# EAGLE board Adafruit_TIMESQUARE (EAGLE 6.3)
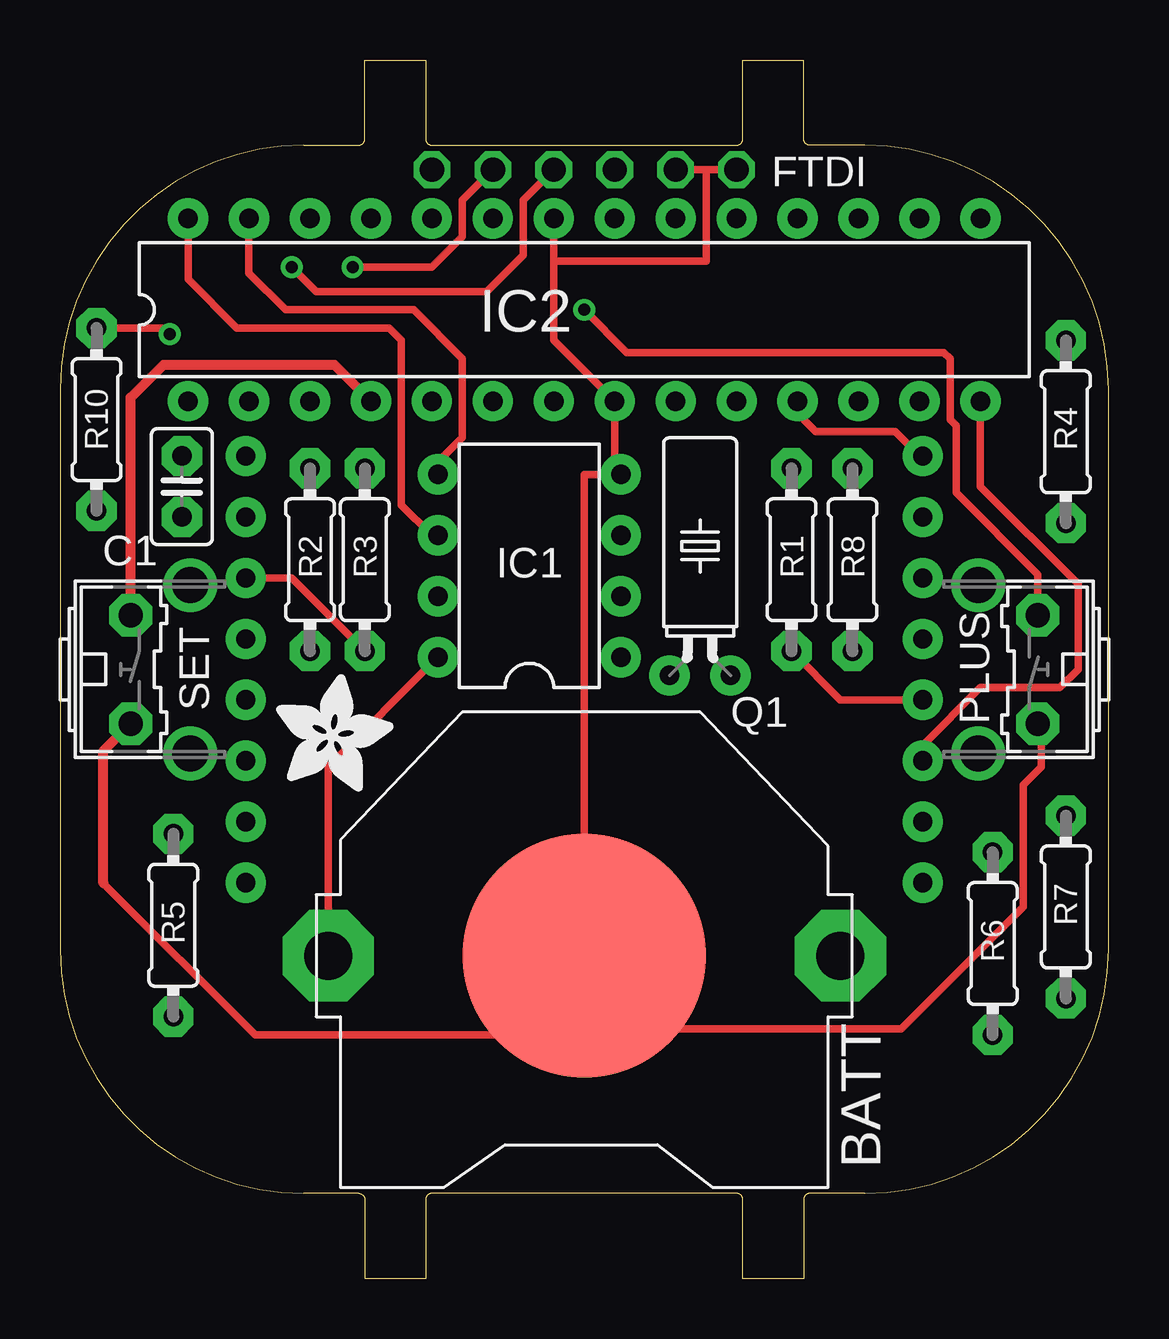
[diagram p0: board, top side]
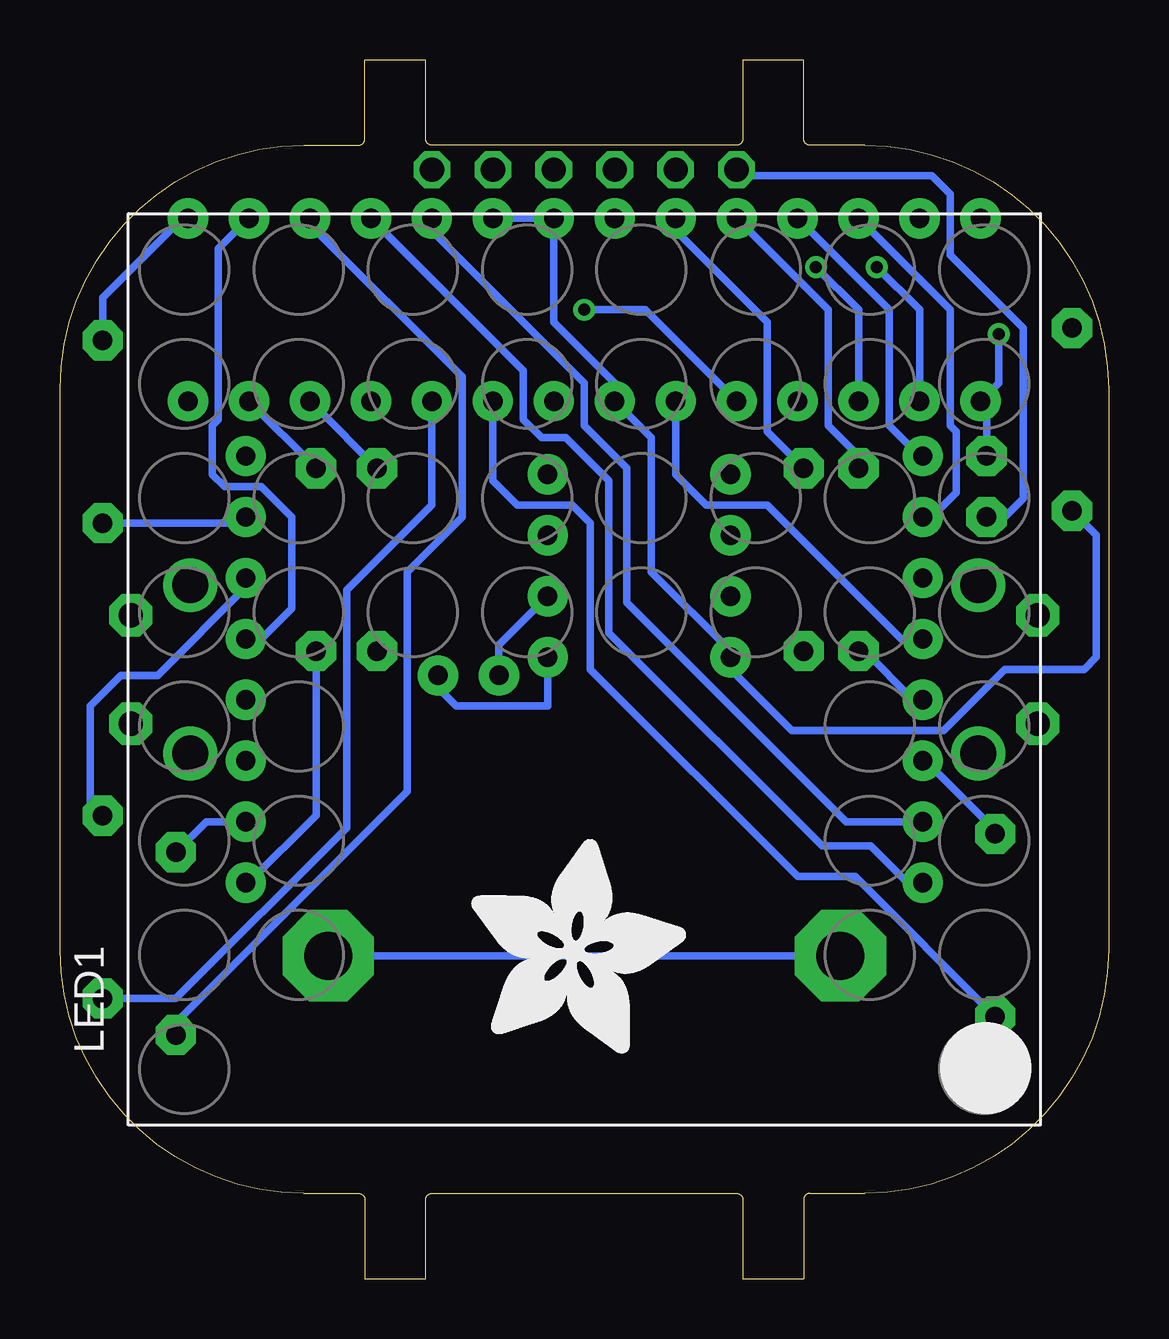
[diagram p1: board, bottom side, seen from below]

Size 43.69 x 50.8 mm. Coordinates in mm from the lower left corner, seen from the top.
Outline: 43.69,37.08 arc90 33.53,47.24 31.24,47.24 arc-90 30.99,47.5 30.99,50.8 28.45,50.8 28.45,47.5 arc-90 28.19,47.24 15.49,47.24 arc-90 15.24,47.5 15.24,50.8 12.7,50.8 12.7,47.5 arc-90 12.45,47.24 10.16,47.24 arc90 0,37.08 0,13.72 arc90 10.16,3.56 12.45,3.56 arc-90 12.7,3.3 12.7,0 15.24,0 15.24,3.3 arc-90 15.49,3.56 28.19,3.56 arc-90 28.45,3.3 28.45,0 30.99,0 30.99,3.3 arc-90 31.24,3.56 33.53,3.56 arc90 43.69,13.72 43.69,37.08
Copper layers (1*16): Top 0.035mm / dielectric 1.5mm / Bottom 0.035mm
Design rules "default *": minimum track width 12mil, minimum drill 19mil, track to track 10mil, track to pad 10mil, pad to pad 10mil, via to via 10mil, smd to smd 10mil, copper to edge 10mil, drill to drill 8mil, minimum pad ring 10mil, minimum via ring 8mil, stop-mask expansion 4mil, vias tented up to drill 0mil, thermal gap 10mil

## Footprints (pad centres in the part's own frame; a part is rotated, then mirrored left to right if it is on the bottom)
CR2032-THRU = drill 2 pad 3.81 octagon: +1 -10.668,0; +2 10.668,0 | smd 10.16 x 10.16: - 0,0
C025-025X050 = drill 0.813 pad 1.676 octagon: 1 -1.27,0; 2 1.27,0
1X06-CLEAN = drill 1.016 octagon: 1 -6.35,0; 2 -3.81,0; 3 -1.27,0; 4 1.27,0; 5 3.81,0; 6 6.35,0
DIL08-ROUND = drill 0.813 pad 1.676: 1 -3.81,-3.81; 2 -1.27,-3.81; 3 1.27,-3.81; 4 3.81,-3.81; 5 3.81,3.81; 6 1.27,3.81; 7 -1.27,3.81; 8 -3.81,3.81
DIL28-3-ROUND = drill 0.813 pad 1.676: 1 -16.51,-3.81; 2 -13.97,-3.81; 3 -11.43,-3.81; 4 -8.89,-3.81; 5 -6.35,-3.81; 6 -3.81,-3.81; 7 -1.27,-3.81; 8 1.27,-3.81; 9 3.81,-3.81; 10 6.35,-3.81; 11 8.89,-3.81; 12 11.43,-3.81; 13 13.97,-3.81; 14 16.51,-3.81; 15 16.51,3.81; 16 13.97,3.81; 17 11.43,3.81; 18 8.89,3.81; 19 6.35,3.81; 20 3.81,3.81; 21 1.27,3.81; 22 -1.27,3.81; 23 -3.81,3.81; 24 -6.35,3.81; 25 -8.89,3.81; 26 -11.43,3.81; 27 -13.97,3.81; 28 -16.51,3.81
SEGMENT_BL-M15A881 = drill 0.8 pad 1.676: 1 -8.89,-14.1; 2 -6.35,-14.1; 3 -3.81,-14.1; 4 -1.27,-14.1; 5 1.27,-14.1; 6 3.81,-14.1; 7 6.35,-14.1; 8 8.89,-14.1; 9 8.89,14.1; 10 6.35,14.1; 11 3.81,14.1; 12 1.27,14.1; 13 -1.27,14.1; 14 -3.81,14.1; 15 -6.35,14.1; 16 -8.89,14.1
B3F-31XX-SKINNIER = drill 1.016 pad 1.778 octagon: 1 -2.261,-1.245; 2 2.261,-1.245 | drill 1.499 pad 2.032: 3 -3.505,1.245; 4 3.505,1.245
TC38H = drill 0.813 pad 1.676: 1 -1.27,0; 2 1.27,0
0204/7 = drill 0.813 pad 1.676 octagon: 1 -3.81,0; 2 3.81,0

## Placement (x,y rotation side)
BATT  CR2032  [CR2032-THRU]  21.84,13.46 180 top
C1  0.1uF  [C025-025X050]  5.08,33.02 90 top
FTDI  DNP  [1X06-CLEAN]  21.84,46.23 180 top
IC1  DS1337  [DIL08-ROUND]  19.56,29.72 90 top
IC2  ATMEGA168PROUND  [DIL28-3-ROUND]  21.84,40.39 0 top
LED1  BL-M15881B  [SEGMENT_BL-M15A881]  21.84,25.4 90 bottom
PLUS  [B3F-31XX-SKINNIER]  39.5,25.4 90 top
Q1  32.768KHz  [TC38H]  26.67,25.15 0 top
R1  47  [0204/7]  30.48,29.97 270 top
R2  47  [0204/7]  10.41,29.97 270 top
R3  47  [0204/7]  12.7,29.97 270 top
R4  47  [0204/7]  41.91,35.31 270 top
R5  47  [0204/7]  4.72,14.73 90 top
R6  47  [0204/7]  38.86,13.97 90 top
R7  47  [0204/7]  41.91,15.49 90 top
R8  47  [0204/7]  33.02,29.97 270 top
R10  10K  [0204/7]  1.52,35.81 90 top
SET  [B3F-31XX-SKINNIER]  4.19,25.4 270 top
U$1  [ADAFRUIT_5MM]  9.02,20.32 0 top
U$2  [ADAFRUIT_9MM]  26.54,9.4 0 bottom

## Library data of the parts
BATT C1 FTDI IC1 IC2 LED1 PLUS R1-R8 R10 SET = adafruit
Q1 = adafruit; OC_FARNELL: unknown; OC_NEWARK: unknown
U$1 U$2 = microbuilder

## Nets
GND: BATT.- FTDI.1 FTDI.2 IC1.4 IC2.8 IC2.22 PLUS.1 SET.2
I2C_SCL: IC1.6 IC2.28
I2C_SDA: IC1.5 IC2.27
LEDANODE0: LED1.13 R1.2
LEDANODE1: LED1.3 R5.2
LEDANODE2: LED1.4 R2.2
LEDANODE3: LED1.10 R4.2
LEDANODE4: LED1.6 R3.2
LEDANODE5: LED1.11 R7.2
LEDANODE6: LED1.15 R6.2
LEDANODE7: LED1.16 R8.2
LEDCATHODE0: IC2.11 LED1.9
LEDCATHODE1: IC2.14 LED1.14
LEDCATHODE2: IC2.25 LED1.8
LEDCATHODE3: IC2.16 LED1.12
LEDCATHODE4: IC2.18 LED1.1
LEDCATHODE5: IC2.26 LED1.7
LEDCATHODE6: IC2.19 LED1.2
LEDCATHODE7: IC2.6 LED1.5
N$1: C1.2 IC2.1 R10.2
N$2: IC1.1 Q1.2
N$3: IC1.2 Q1.1
N$4: IC2.4 SET.1
N$5: IC2.5 PLUS.2
N$6: IC2.12 R1.1
N$7: IC2.23 R3.1
N$8: IC2.9 R5.1
N$9: IC2.10 R7.1
N$10: IC2.24 R2.1
N$11: IC2.17 R6.1
N$13: IC2.13 R8.1
N$14: IC2.15 R4.1
N$16: C1.1 FTDI.6
RXD: FTDI.4 IC2.2
TXD: FTDI.5 IC2.3
VCC: BATT.+1 BATT.+2 IC1.8 IC2.7 IC2.20 IC2.21 R10.1

## Tracks (layer width: path | path; a pad name or v marks a point on that pad's centre or on a via)
GND
  Top 0.305: BATT.- 21.84,13.72 | BATT.- 21.84,33.53 IC1.4 23.11,33.78 IC2.8 20.57,39.12 IC2.22 20.57,42.42 26.92,42.42 26.92,46.23 | 1.8,16.48 8.13,10.16 18.29,10.16 21.34,13.21 21.84,13.21 BATT.- | BATT.- 24.89,10.41 35.05,10.41 40.13,15.49 40.13,20.57 40.89,21.34 40.89,22.99 PLUS.1 | 26.92,46.23 FTDI.2 | 26.92,46.23 FTDI.1
  Top 0.406: 1.8,16.48 1.8,22 SET.2
I2C_SCL
  Top 0.305: IC2.28 5.33,41.66 7.37,39.62 13.72,39.62 14.22,39.12 14.22,32.26 15.49,30.99 IC1.6
I2C_SDA
  Top 0.305: IC2.27 7.87,41.91 9.4,40.39 14.73,40.39 16.76,38.35 16.76,35.05 15.75,34.04 IC1.5 15.75,33.27
LEDANODE0
  Top 0.305: 36.07,24.13 LED1.13 32.51,24.13 R1.2
LEDANODE1
  Bottom 0.305: LED1.3 7.62,21.59 4.72,18.69 R5.2
LEDANODE2
  Bottom 0.305: LED1.4 8.13,24.13 10.16,26.16 R2.2
LEDANODE3
  Bottom 0.305: R4.2 36.3,31.5 36.04,31.75 LED1.10
LEDANODE4
  Top 0.305: 7.62,29.21 LED1.6 9.65,29.21 R3.2
LEDANODE5
  Bottom 0.305: R7.2 42.42,19.81 42.42,23.88 41.15,25.15 39.62,25.15 35.94,28.83 LED1.11
LEDANODE6
  Bottom 0.305: R6.2 37.59,19.05 LED1.15
LEDANODE7
  Bottom 0.305: LED1.16 35.81,16.51 33.02,19.3 R8.2
LEDCATHODE0
  Top 0.305: IC2.11 30.73,36.07 31.5,35.31 34.8,35.31 35.81,34.29 LED1.9 36.07,34.29
LEDCATHODE1
  Top 0.305: IC2.14 38.35,33.02 42.42,28.96 42.42,25.4 41.66,24.64 38.35,24.64 35.92,22.2 35.94,22.2 LED1.14
LEDCATHODE2
  Bottom 0.305: IC2.25 9.14,40.39 9.14,35.56 7.87,34.29 LED1.8
LEDCATHODE3
  Bottom 0.305: 36.07,26.67 LED1.12 35.31,26.67 34.04,27.94 34.04,31.75 35.31,33.02 36.83,33.02 37.34,33.53 37.34,35.56 37.08,35.81 37.08,42.93 IC2.16
LEDCATHODE4
  Bottom 0.305: IC2.18 24.38,37.85 24.38,35.81 23.62,35.05 22.61,35.05 20.83,33.27 20.83,26.92 11.94,18.03 9.91,18.03 8.38,16.51 LED1.1
LEDCATHODE5
  Bottom 0.305: IC2.26 6.6,40.39 6.6,35.56 6.35,35.31 6.35,32.77 7.37,31.75 LED1.7
LEDCATHODE6
  Bottom 0.305: IC2.19 28.19,43.69 21.84,37.34 21.84,35.56 20.07,33.78 20.07,28.19 10.92,19.05 LED1.2 7.62,19.05
LEDCATHODE7
  Bottom 0.305: IC2.6 18.03,33.53 16.76,32.26 14.22,32.26 8.64,26.67 LED1.5
N$1  (via drill 0.5)
  Top 0.305: R10.2 4.32,39.62 v4.57,39.37
  Bottom 0.305: C1.2 5.08,36.32 IC2.1 4.57,37.34 v4.57,39.37
N$2
  Bottom 0.305: IC1.1 23.37,23.88 27.18,23.88 27.94,24.64 Q1.2
N$3
  Bottom 0.305: IC1.2 25.4,26.42 Q1.1
N$4
  Top 0.406: SET.1 2.95,36.73 4.32,38.1 11.43,38.1 IC2.4
N$5  (via drill 0.5)
  Top 0.305: PLUS.2 40.74,29.36 37.34,32.77 37.34,35.56 37.08,35.81 37.08,38.35 36.83,38.61 23.62,38.61 v21.84,40.39
  Bottom 0.305: v21.84,40.39 19.3,40.39 IC2.5
N$6
  Bottom 0.305: IC2.12 33.53,36.32 33.02,36.32 R1.1
N$7
  Bottom 0.305: R3.1 14.22,35.31 14.22,39.88 18.03,43.69 IC2.23
N$8
  Bottom 0.305: R5.1 10.56,16.76 12.95,16.76 21.59,25.4 21.59,31.5 22.35,32.26 24.64,32.26 25.65,33.27 IC2.9
N$9
  Bottom 0.305: R7.1 38.86,11.68 31.75,18.8 31.75,28.7 28.19,32.26 IC2.10
N$10
  Bottom 0.305: IC2.24 11.68,40.39 11.68,35.56 10.41,34.29 R2.1
N$11
  Bottom 0.305: R6.1 38.86,10.67 29.21,20.32 29.21,29.46 26.92,31.75 26.92,37.59 33.27,43.94 IC2.17
N$13
  Bottom 0.305: R8.1 IC2.13 36.07,36.58
N$14
  Bottom 0.305: IC2.15 38.35,44.45 41.91,40.89 R4.1
N$16
  Bottom 0.305: FTDI.6 15.24,45.97 7.37,45.97 6.6,45.21 6.6,42.67 3.56,39.62 3.56,32.51 4.57,31.5 4.83,31.5 C1.1
RXD  (via drill 0.5)
  Top 0.305: v9.65,42.16 10.67,41.15 17.78,41.15 19.3,42.67 19.3,44.96 FTDI.4
  Bottom 0.305: IC2.2 7.87,40.39 v9.65,42.16
TXD  (via drill 0.5)
  Top 0.305: v12.19,42.16 15.49,42.16 16.76,43.43 16.76,44.96 FTDI.5
  Bottom 0.305: IC2.3 10.41,40.39 v12.19,42.16
VCC
  Top 0.305: BATT.+2 11.18,21.34 IC1.8
  Bottom 0.305: IC2.20 23.37,44.2 23.11,43.94 23.11,39.88 20.57,37.34 IC2.7 19.05,35.05 19.05,29.46 15.75,26.16 IC1.8 15.49,25.65 15.49,25.15 13.21,22.86 6.86,22.86 4.32,25.4 1.02,25.4 0.51,25.91 0.51,30.99 R10.1 | BATT.+1 BATT.+2 10.92,13.72
  Bottom 0.406: IC2.21 23.37,44.2 23.11,44.45

## Text on the board
tDocu: CR2032
bDocu: TIMESQUARE | DIY Watch Kit! | MATRIX TEXT ON THIS SIDE->